# EAGLE board ND_PCR (EAGLE 5.12)
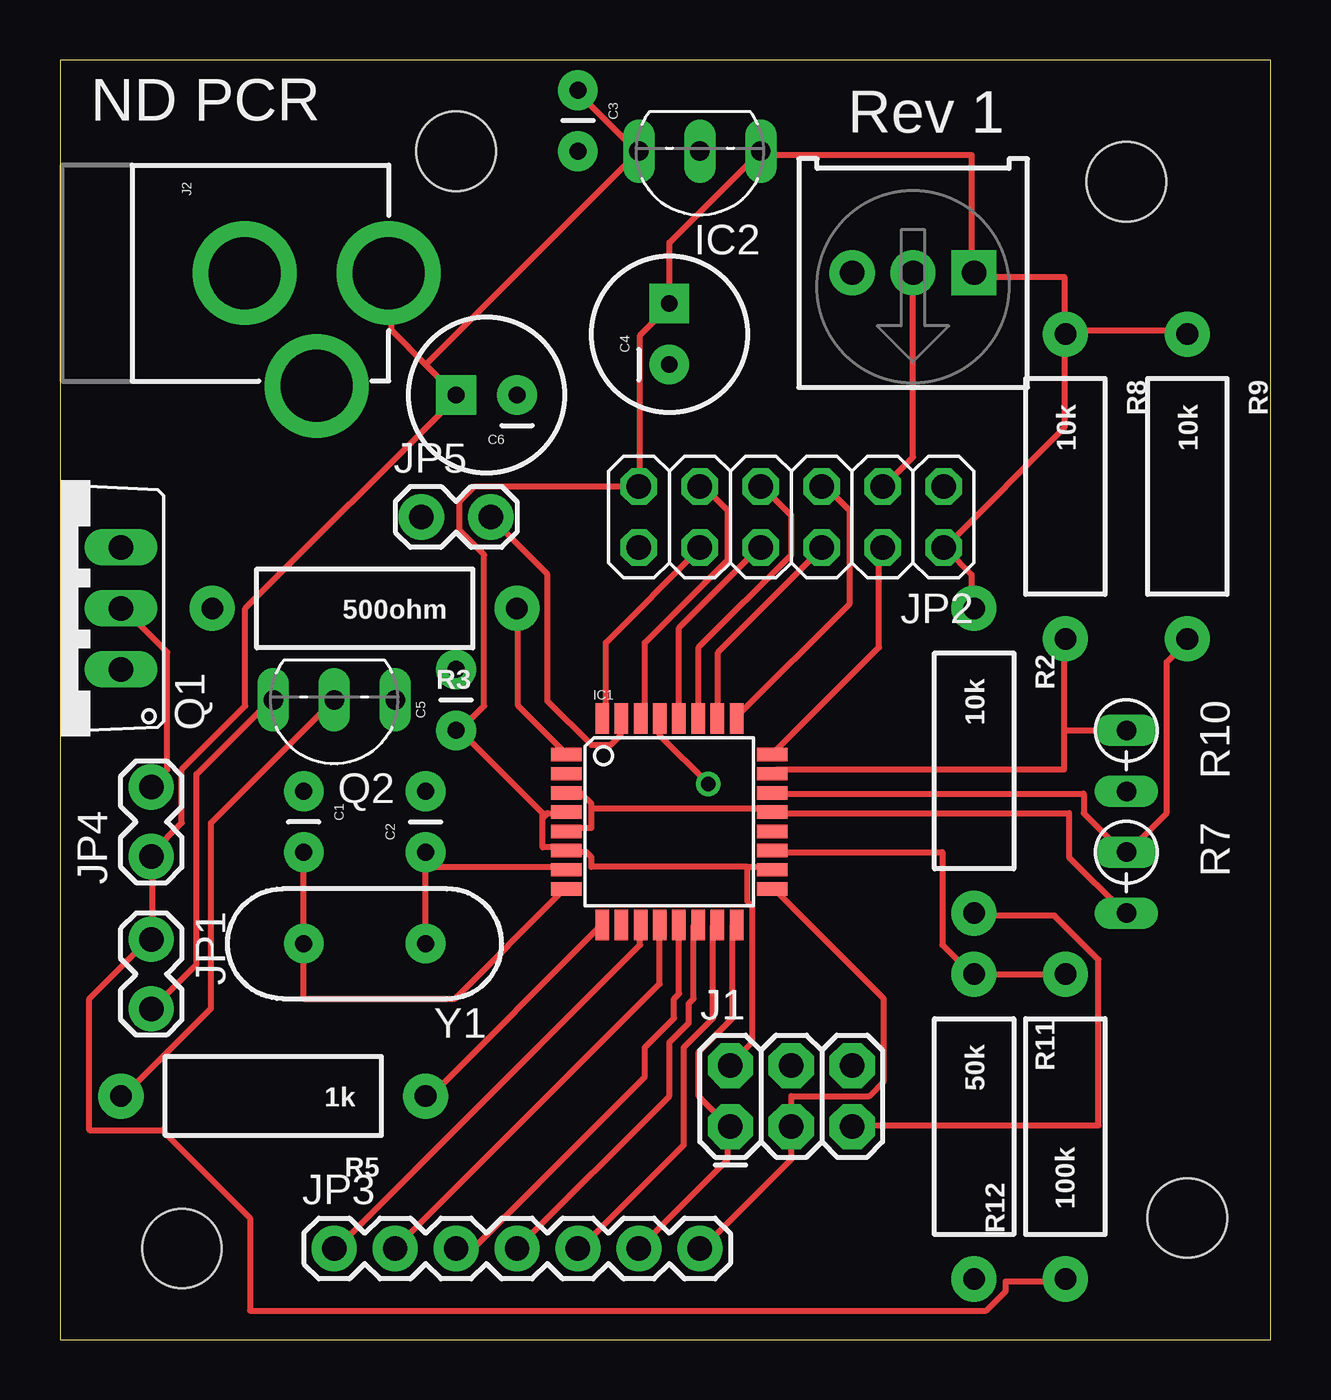
[diagram p0: board, top side]
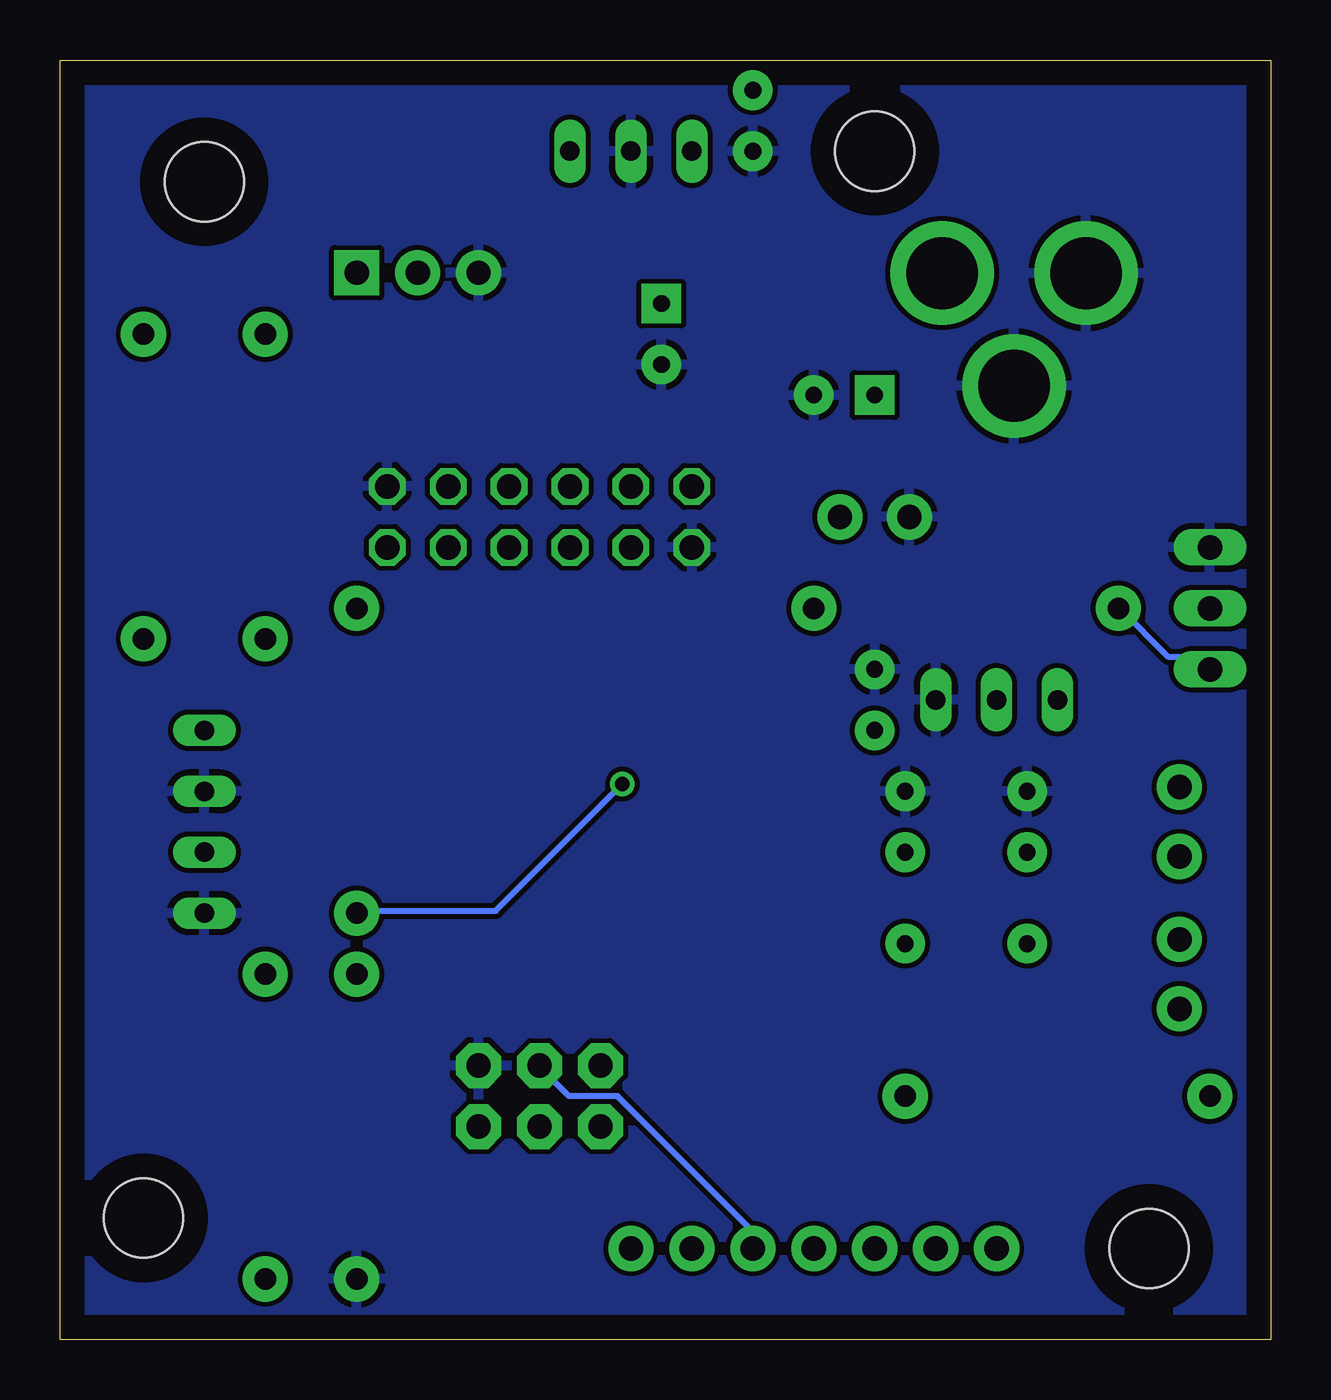
[diagram p1: board, bottom side, seen from below]

Size 50.47 x 53.33 mm. Coordinates in mm from the lower left corner, seen from the top.
Outline: 0,0 50.47,0 50.47,53.33 0,53.33 0,0
Copper layers (1*16): Top 0.035mm / dielectric 1.5mm / Bottom 0.035mm
Design rules "default": minimum track width 10mil, minimum drill 24mil, track to track 8mil, track to pad 8mil, pad to pad 8mil, via to via 8mil, smd to smd 8mil, copper to edge 40mil, drill to drill 8mil, minimum pad ring 10mil, minimum via ring 8mil, stop-mask expansion 4mil, vias tented up to drill 0mil, thermal gap 10mil

## Footprints (pad centres in the part's own frame; a part is rotated, then mirrored left to right if it is on the bottom)
CAP-PTH-SMALL = drill 0.7 pad 1.651 round: 1 0,0; 2 2.54,0
CPOL-RADIAL-100UF-25V = drill 0.7 pad 1.651 square: 1 1.27,0 | drill 0.7 pad 1.651 round: 2 -1.27,0
TQFP32-08 = smd 1.27 x 0.559: 1 -4.293,2.8; 2 -4.293,2; 3 -4.293,1.2; 4 -4.293,0.4; 5 -4.293,-0.4; 6 -4.293,-1.2; 7 -4.293,-2; 8 -4.293,-2.8; 17 4.293,-2.8; 18 4.293,-2; 19 4.293,-1.2; 20 4.293,-0.4; 21 4.293,0.4; 22 4.293,1.2; 23 4.293,2; 24 4.293,2.8 | smd 0.559 x 1.27: 9 -2.8,-4.293; 10 -2,-4.293; 11 -1.2,-4.293; 12 -0.4,-4.293; 13 0.4,-4.293; 14 1.2,-4.293; 15 2,-4.293; 16 2.8,-4.293; 25 2.8,4.293; 26 2,4.293; 27 1.2,4.293; 28 0.4,4.293; 29 -0.4,4.293; 30 -1.2,4.293; 31 -2,4.293; 32 -2.8,4.293
TO92- = drill 0.813 long: 1 2.54,0; 2 0,0; 3 -2.54,0
2X3 = drill 1.016 pad 1.88 octagon: 1 0,0; 2 0,2.54; 3 2.54,0; 4 2.54,2.54; 5 5.08,0; 6 5.08,2.54
POWER_JACK_PTH = drill 2.997 pad 4.318 round: GND 0,7.7; GNDBREAK 4.7,10.7; PWR 0,13.7
1X02_LOCK = drill 1.016 pad 1.88 round: 1 -0.178,0; 2 2.718,0
2X06 = drill 1.016 octagon: 1 -6.35,-1.27; 2 -6.35,1.27; 3 -3.81,-1.27; 4 -3.81,1.27; 5 -1.27,-1.27; 6 -1.27,1.27; 7 1.27,-1.27; 8 1.27,1.27; 9 3.81,-1.27; 10 3.81,1.27; 11 6.35,-1.27; 12 6.35,1.27
1X07 = drill 1.016 pad 1.88 round: 1 0,0; 2 2.54,0; 3 5.08,0; 4 7.62,0; 5 10.16,0; 6 12.7,0; 7 15.24,0
TO220AV = drill 1.016 long: B -2.54,-2.54; C 0,-2.54; E 2.54,-2.54
TO92-EBC = drill 0.813 long: B 0,-1.27; C -2.54,-1.27; E 2.54,-1.27
AXIAL-0.5 = drill 0.9 pad 1.88 round: P$1 -6.35,0; P$2 6.35,0
RS-2,5 = drill 0.813 long: 1 -1.27,0; 2 1.27,0
3386U = drill 1.016 pad 1.88 square: 1 -2.54,-0.015 | drill 1.016 pad 1.88 round: 2 0,-0.015; 3 2.54,-0.015
STAND-OFF = hole 3.302: 0,0
HC49US = drill 0.7 pad 1.651 round: 1 -2.54,0; 2 2.54,0

## Placement (x,y rotation side)
C1  20 pF  [CAP-PTH-SMALL]  10.16,22.86 270 top
C2  20 pF  [CAP-PTH-SMALL]  15.24,20.32 90 top
C3  100 nF  [CAP-PTH-SMALL]  21.59,52.07 270 top
C4  100 uF  [CPOL-RADIAL-100UF-25V]  25.4,41.91 90 top
C5  100 nF  [CAP-PTH-SMALL]  16.51,25.4 90 top
C6  100 uF  [CPOL-RADIAL-100UF-25V]  17.78,39.37 180 top
IC1  AVR-MEGA8-AI  [TQFP32-08]  25.4,21.59 0 top
IC2  78L05  [TO92-]  26.67,49.53 180 top
J1  ICSP  [2X3]  27.94,8.89 0 top
J2  POWER_JACKPTH  [POWER_JACK_PTH]  0,44.45 270 top
JP1  Fan connector  [1X02_LOCK]  3.81,16.51 270 top
JP2  LCD  [2X06]  30.48,34.29 180 top
JP3  keypad  [1X07]  11.43,3.81 0 top
JP4  2x 27ohm in ||  [1X02_LOCK]  3.81,20.32 90 top
JP5  serial out  [1X02_LOCK]  15.24,34.29 0 top
Q1  TIP120TO220V  [TO220AV]  0,30.48 90 top
Q2  2N2222TO92  [TO92-EBC]  11.43,25.4 180 top
R2  10k  [AXIAL-0.5]  38.1,24.13 270 top
R3  500ohm  [AXIAL-0.5]  12.7,30.48 180 top
R5  1k  [AXIAL-0.5]  8.89,10.16 180 top
R7  NTC2k  [RS-2,5]  44.45,19.05 270 top
R8  10k  [AXIAL-0.5]  41.91,35.56 270 top
R9  10k  [AXIAL-0.5]  46.99,35.56 270 top
R10  NTC2k  [RS-2,5]  44.45,24.13 270 top
R11  50k  [AXIAL-0.5]  38.1,8.89 270 top
R12  100k  [AXIAL-0.5]  41.91,8.89 90 top
R13  TRIMPOT-PTH-KNOB  [3386U]  35.56,44.45 180 top
U$1  [STAND-OFF]  16.51,49.53 0 top
U$2  [STAND-OFF]  5.08,3.81 0 top
U$3  [STAND-OFF]  44.45,48.26 0 top
U$5  [STAND-OFF]  46.99,5.08 0 top
Y1  16 MHz  [HC49US]  12.7,16.51 180 top

## Library data of the parts
C1-C6 IC1 J1 J2 JP1 JP3-JP5 R2 R3 R5 R8 R9 R11-R13 U$1-U$3 U$5 Y1 = SparkFun
IC2 = v-reg
JP2 = pinhead
Q1 = transistor-power
Q2 = transistor-npn
R7 R10 = varistor

## Nets
GND: C1.1 C2.2 C3.2 C4.2 C5.2 C6.2 IC1.3 IC1.5 IC1.21 IC2.2 J1.6 J2.GND J2.GNDBREAK JP2.1 JP2.12 JP5.1 Q1.E Q2.C R7.2 R10.2 R11.P$2 R13.3
N$1: C2.1 IC1.7 Y1.1
N$2: C1.2 IC1.8 Y1.2
N$3: IC1.23 R8.P$2 R10.1
N$4: IC1.15 J1.4 JP3.5
N$5: JP4.2 Q1.C
N$6: IC1.29 J1.5 R2.P$2
N$7: IC1.16 J1.1 JP3.6
N$8: IC1.17 J1.3 JP3.7
N$9: IC1.24 JP2.4
N$10: IC1.1 R3.P$1
N$11: Q1.B R3.P$2
N$12: IC1.31 JP5.2
N$13: IC1.22 R7.1 R9.P$2
N$14: IC1.9 R5.P$1
N$15: JP1.2 Q2.E
N$16: IC1.26 JP2.6
N$17: Q2.B R5.P$2
N$18: IC1.19 R11.P$1 R12.P$2
N$19: JP2.3 R13.2
N$20: IC1.25 JP2.5
N$21: IC1.28 JP2.8
N$22: IC1.27 JP2.7
N$23: IC1.30 JP2.9
N$25: IC1.32 JP2.10
N$27: IC1.11 JP3.1
N$28: IC1.12 JP3.2
N$29: IC1.13 JP3.3
N$30: IC1.14 JP3.4
V+: C3.1 C6.1 IC2.1 J2.PWR JP1.1 JP4.1 R12.P$1
VCC: C4.1 C5.1 IC1.4 IC1.6 IC1.18 IC2.3 J1.2 JP2.2 JP2.11 R2.P$1 R8.P$1 R9.P$1 R13.1

## Tracks (layer width: path | path; a pad name or v marks a point on that pad's centre or on a via)
GND
  Top 0.254: 22.15,22.15 22.15,22.35 21.74,22.76 21.13,22.76 IC1.3 | 22.15,22.15 22.15,21.34 21.13,21.34 IC1.5 | 22.15,22.15 29.67,22.15 IC1.21 29.87,21.95 42.06,21.95 42.06,20.12 44.3,17.88 R7.2
  pour Bottom: -2.54,54.61 -2.54,-2.54 54.61,-2.54 54.61,54.61
N$1
  Top 0.254: 15.24,19.71 20.93,19.71 IC1.7 | Y1.1 15.24,19.71 | 15.24,19.71 C2.1
N$2
  Top 0.254: IC1.8 20.93,18.69 16.46,14.22 10.16,14.22 Y1.2 C1.2
N$3
  Top 0.254: 41.86,25.4 41.86,29.06 R8.P$2 | 41.86,25.4 41.86,23.77 29.87,23.77 IC1.23 | 41.86,25.4 R10.1
N$4
  Top 0.254: IC1.15 27.23,17.27 27.23,13.41 26.01,12.19 26.01,8.13 21.74,3.86 JP3.5
  Bottom 0.254: J1.4 30.48,11.38 29.26,10.16 27.23,10.16 21.74,4.67 21.74,3.86 JP3.5
N$5
  Top 0.254: Q1.C 2.64,30.48 4.47,28.65 4.47,23.77 3.86,23.16 JP4.2
N$6  (via drill 0.61)
  Top 0.254: v27.03,23.16 24.99,25.2 24.99,25.81 IC1.29 | J1.5 33.12,8.94 43.28,8.94 43.28,15.85 41.45,17.68 38.2,17.68 R2.P$2
  Bottom 0.254: v27.03,23.16 32.31,17.88 38,17.88 R2.P$2
N$7
  Top 0.254: IC1.16 28.04,17.27 28.04,13.41 26.62,11.99 26.62,10.16 27.84,8.94 J1.1 27.84,8.74 27.84,7.52 JP3.6
N$8
  Top 0.254: IC1.17 29.87,18.69 34.34,14.22 34.34,10.77 33.73,10.16 30.48,10.16 J1.3 30.48,7.52 26.82,3.86 JP3.7
N$9
  Top 0.254: IC1.24 29.87,24.59 34.14,28.85 34.14,32.92 JP2.4
N$10
  Top 0.254: IC1.1 20.93,24.59 19.1,26.42 19.1,30.48 R3.P$1
N$11
  Bottom 0.254: Q1.B 3.05,28.45 4.27,28.45 6.3,30.48 R3.P$2
N$12
  Top 0.254: IC1.31 23.37,25.81 23.37,25.2 22.96,24.79 22.15,24.79 20.32,26.62 20.32,31.9 18.09,34.14 JP5.2
N$13
  Top 0.254: IC1.22 29.87,22.76 42.67,22.76 42.67,21.95 44.3,20.32 R7.1 44.5,20.32 46.13,21.95 46.13,28.25 46.94,29.06 R9.P$2
N$14
  Top 0.254: R5.P$1 15.44,10.16 22.55,17.27 IC1.9
N$15
  Top 0.254: Q2.E 8.74,26.62 5.69,23.57 5.69,15.65 3.86,13.82 JP1.2
N$16
  Top 0.254: IC1.26 27.43,26.01 27.43,28.65 31.7,32.92 JP2.6
N$17
  Top 0.254: Q2.B 6.3,21.54 6.3,13.82 2.64,10.16 R5.P$2
N$18
  Top 0.254: IC1.19 29.87,20.32 36.78,20.32 36.78,16.46 38,15.24 R11.P$1 R12.P$2
N$19
  Top 0.254: JP2.3 34.34,35.56 35.56,36.78 R13.2
N$20
  Top 0.254: IC1.25 28.25,26.01 32.92,30.68 32.92,34.54 31.9,35.56 JP2.5
N$21
  Top 0.254: IC1.28 25.81,26.01 25.81,29.67 29.06,32.92 JP2.8
N$22
  Top 0.254: IC1.27 26.62,26.01 26.62,28.85 30.48,32.72 30.48,34.34 29.26,35.56 JP2.7
N$23
  Top 0.254: IC1.30 24.38,26.01 24.38,29.06 27.84,32.51 27.84,34.54 26.82,35.56 JP2.9
N$25
  Top 0.254: IC1.32 22.76,26.01 22.76,29.06 26.62,32.92 JP2.10
N$27
  Top 0.254: IC1.11 24.18,17.27 24.18,16.46 11.58,3.86 JP3.1
N$28
  Top 0.254: IC1.12 24.99,17.27 24.99,14.83 JP3.2
N$29
  Top 0.254: IC1.13 25.81,17.27 25.81,14.43 25.6,14.22 25.6,13.41 24.38,12.19 24.38,10.97 17.27,3.86 16.66,3.86 JP3.3
N$30
  Top 0.254: IC1.14 26.42,17.27 26.42,14.22 26.21,14.02 26.21,13.21 25.4,12.39 25.4,10.16 JP3.4
V+
  Top 0.254: C3.1 21.74,52.02 21.74,51.82 23.98,49.58 IC2.1 15.24,40.64 | 15.24,40.64 13.82,42.06 13.82,44.3 J2.PWR | 15.24,40.64 C6.1 16.46,39.22 7.72,30.48 7.72,26.42 5.08,23.77 5.08,21.54 3.86,20.32 JP4.1 3.86,20.12 3.86,16.87 JP1.1 3.66,16.66 1.22,14.22 1.22,8.74 4.27,8.74 7.92,5.08 7.92,1.22 38.61,1.22 39.42,2.03 39.42,2.44 41.86,2.44 R12.P$1
VCC
  Top 0.254: 20.12,21.74 20.12,20.52 20.93,20.52 IC1.6 21.13,20.32 21.95,20.32 22.15,20.12 22.15,19.71 28.65,19.71 | 20.12,21.74 20.32,21.95 20.93,21.95 IC1.4 | 28.65,19.71 29.67,19.71 IC1.18 | 16.66,25.4 20.12,21.95 20.12,21.74 | 28.65,19.71 28.65,18.29 28.85,18.09 28.85,12.39 28.04,11.58 J1.2 | R2.P$1 38,30.48 38,31.9 36.98,32.92 JP2.2 36.98,33.12 41.86,38 41.86,41.86 R8.P$1 | R8.P$1 42.06,42.06 46.94,42.06 R9.P$1 | R8.P$1 41.86,42.06 41.86,44.3 38.2,44.3 R13.1 38,44.5 38,49.38 29.26,49.38 IC2.3 25.4,45.72 C4.1 25.4,43.08 24.18,41.86 24.18,35.56 JP2.11 17.27,35.56 16.66,34.95 16.66,33.73 17.68,32.72 17.68,26.42 16.66,25.4 | 16.66,25.4 C5.1

## Text on the board
tPlace: Rev 1 | ND PCR